# Altium PCB Top.PcbDoc
Units mm, origin at the board's own origin, x right, y up, seen from the top; angles counter-clockwise.
Board outline 79.88 x 59.94 mm, 2 copper layers (Top Layer, Bottom Layer), stack 1.569 mm thick; 82 components, 71 nets, 335 pads, 76 vias.
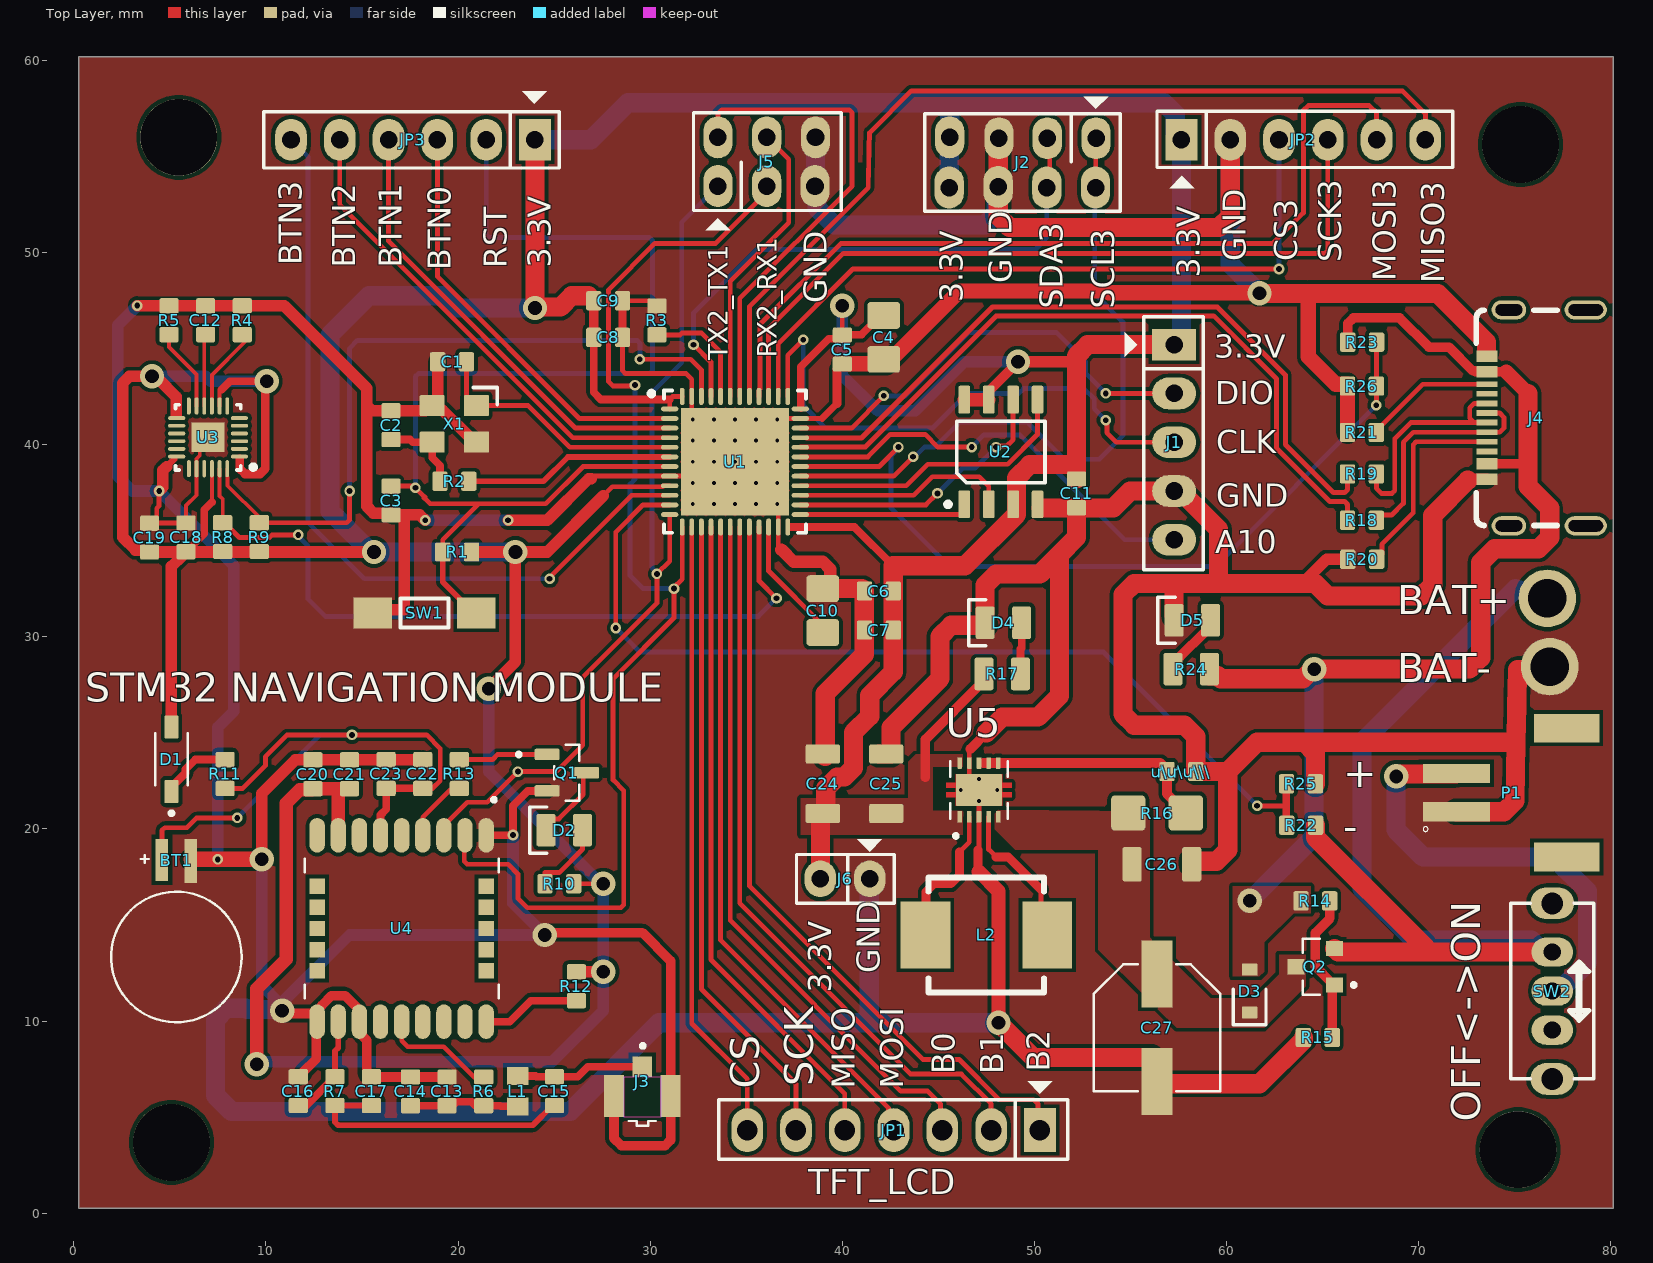
[diagram p0: Top Layer view]
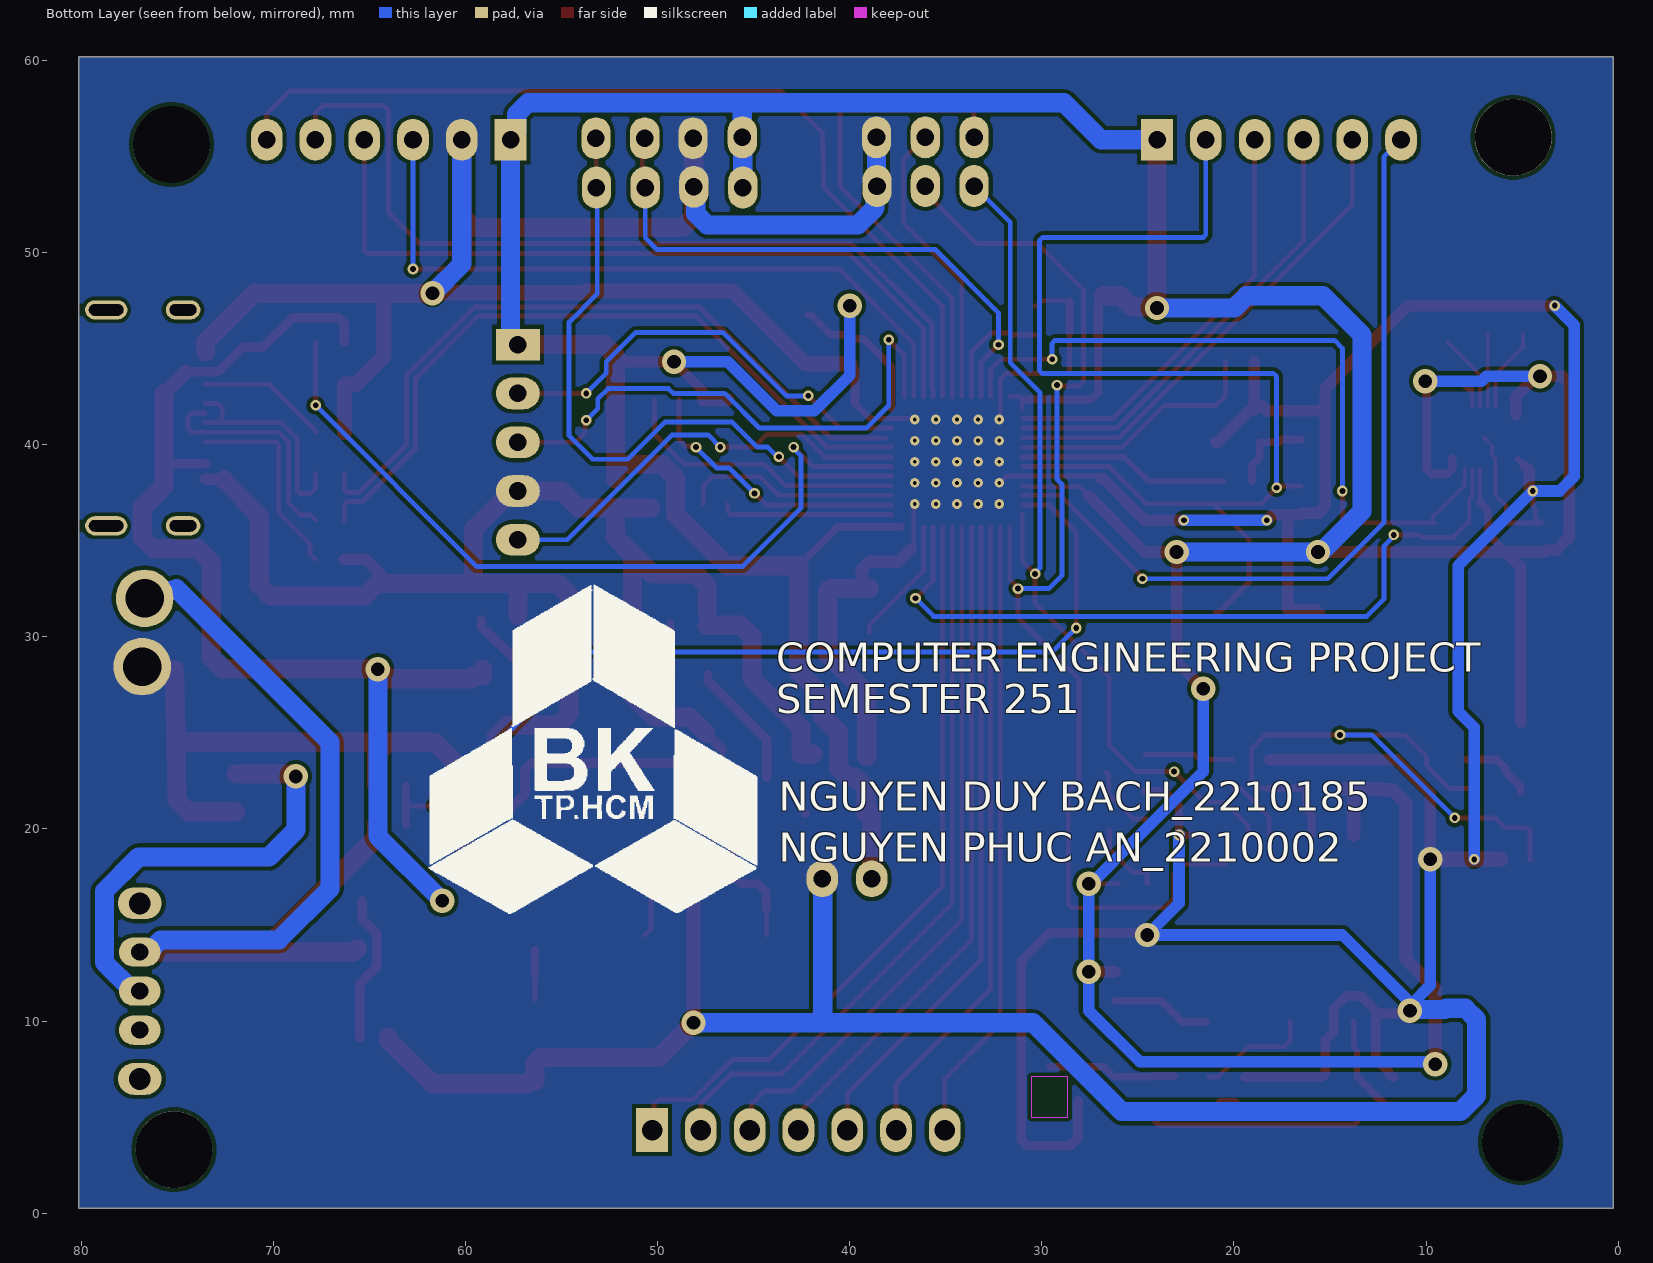
[diagram p1: Bottom Layer view, seen from below]
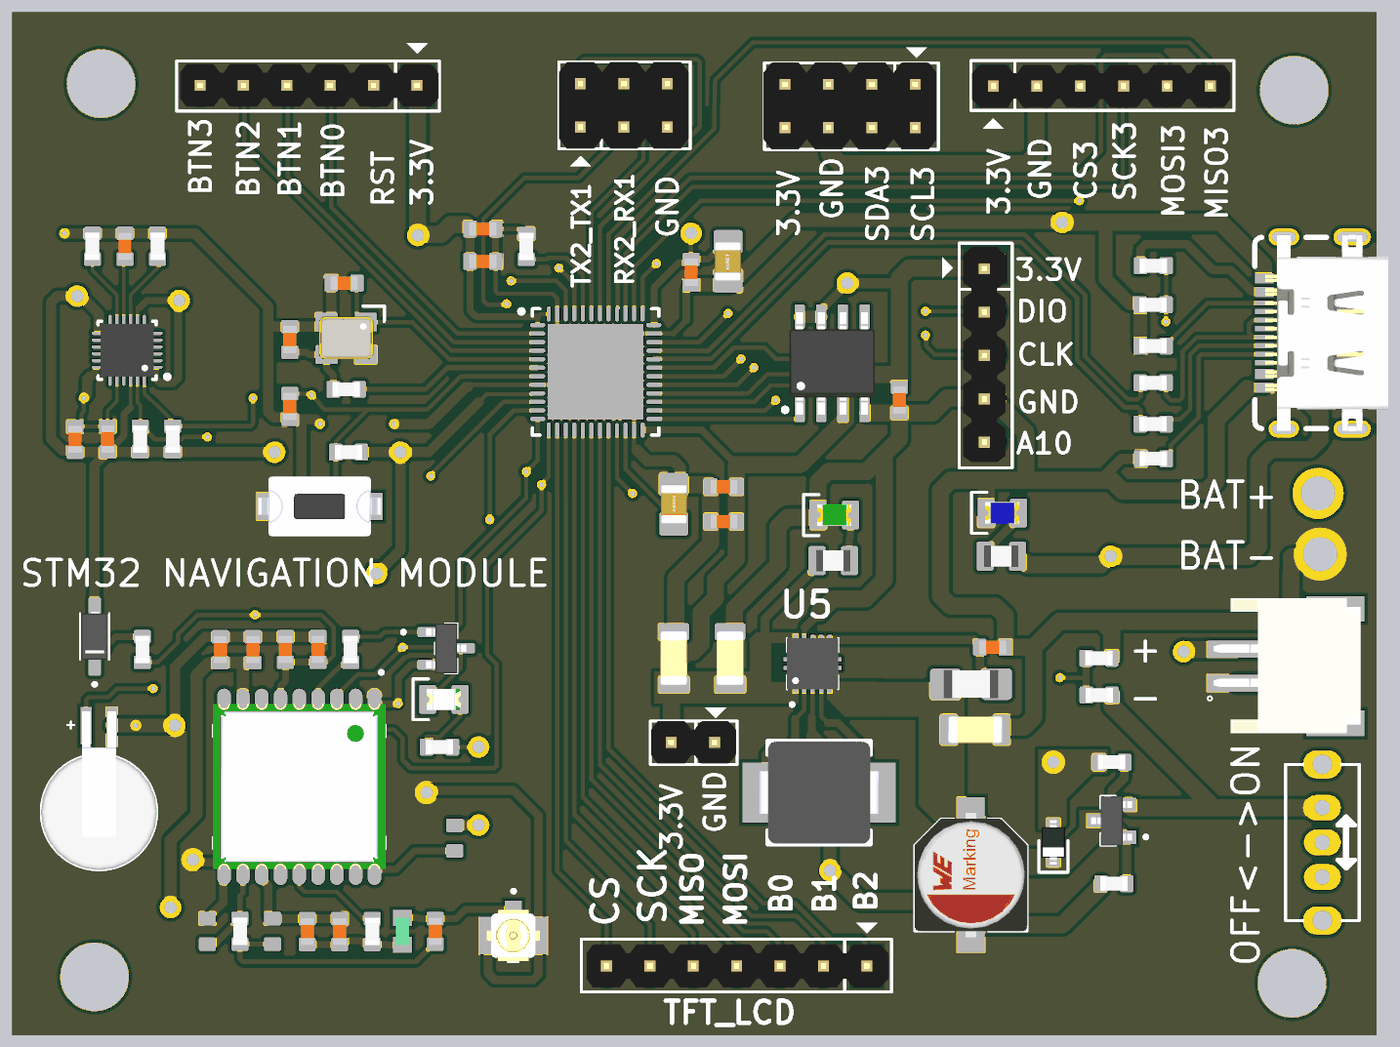
[diagram p2: 3D render of the assembled board from above, using the file's embedded part models]

## Layer stack, top to bottom
Top Solder: solder mask 0.0254, SM-001, Dk 4
Top Layer: signal copper 0.035
Dielectric 1: core 1.4986, Core-043, Dk 4.6
Bottom Layer: signal copper 0.035
Bottom Solder: solder mask 0.0254, SM-001, Dk 4

## Board outline
0.254,0.254 0.254,60.198 80.137,60.198 80.137,0.254

## Design rules (kind name [scope] priority, off if disabled: settings)
Clearance [All] p1: gap=0.2 ignorepadtopadclearanceinfootprint=TRUE
DiffPairsRouting [All] p1: maxlimit=0.203 minlimit=0.203 mostfreqgap=0.203 toplayer_minwidth=0.25 toplayer_maxwidth=0.27 toplayer_prefwidth=0.26 bottomlayer_minwidth=0.25 bottomlayer_maxwidth=0.27 bottomlayer_prefwidth=0.26 impedanceprofiledriven=TRUE maxuncoupledlength=12.7
HoleSize [All] p1: absolutevalues=TRUE maxlimit=4 minlimit=0.025 maxpercent=80.000 minpercent=20.000
MinimumSolderMaskSliver [All] p1: minsoldermaskwidth=0.01
NetAntennae [All] p1 off: netantennaetolerance=1
PolygonConnect [All] p1: connectstyle=Direct reliefconductorwidth=0.254 reliefentries=4 polygonreliefangle="90 Angle" airgapwidth=0.254
RoutingVias [All] p1: holewidth=0.3 width=0.55 viastyle="Through Hole" minholewidth=0.2 minwidth=0.3 maxholewidth=0.1 maxwidth=2
SilkToSolderMaskClearance [IsPad] p1: minsilkscreentomaskgap=0 clearancetoexposedcopper=TRUE
SolderMaskExpansion [All] p1: expansion=0.05 istentingtop=FALSE
SupplyNets "Schematic Supply Nets_6" [InNet('V_BUS')] p1: voltage=0.000
SupplyNets "Schematic Supply Nets_4" [InNet('IMU_VIN')] p2: voltage=0.000
SupplyNets "Schematic Supply Nets_3" [InNet('GND')] p3: voltage=0.000
SupplyNets "Schematic Supply Nets_1" [InNet('GPS_VBAT')] p4: voltage=0.000
SupplyNets "Schematic Supply Nets" [InNet('V_BAT')] p5: voltage=0.000
Width [All] p1: maxlimit=1 minlimit=0.2 preferedwidth=0.25 minimp=50.000000 maximp=50.000000 favimp=50.000000
25 further rules are at their usual default settings.

## Classes and differential pairs
component class Designator: BT1 C12 C13 C14 C15 C16 C17 C18 C19 C20 C21 C22 C23 D1 D2 J3 L1 Q1 R4 R5 R6 R7 R8 R9 R10 R11 R12 R13 U3 U4
differential pair USB_D: +USB_D_P -USB_D_N

## Components (designator, comment, footprint, x,y, rotation, side; value= is the part's Value field where it differs from the comment)
BT1 "MS621FE-FL11E" BAT_MS621FE-FL11E 5.334,13.335 r90 top
C1 "15pF" CAP_0603 19.685,44.323 r180 top
C2 "15pF" CAP_0603 16.51,41.021 r90 top
C3 "100nF" CAP_0603 16.51,37.096 r90 top
C4 "2.2uF" CAP_0805 42.164,45.593 r90 top
C5 "100nF" CAP_0603 40.005,44.958 r90 top
C6 "100nF" CAP_0603 41.91,32.385 r0 top
C7 "100nF" CAP_0603 41.91,30.353 r0 top
C8 "100nF" CAP_0603 27.813,45.593 r180 top
C9 "100nF" CAP_0603 27.813,47.498 r180 top
C10 "2.2uF" CAP_0805 38.989,31.369 r270 top
C11 "0603 100nF 16V 10%" CAP_0603 52.197,37.465 r90 top
C12 "100nF" CAP_0603 6.858,46.482 r270 top
C13 "SMD 0603 100pF" CAP_0603 19.431,6.338 r90 top
C14 "SMD 0603 100nF" CAP_0603 17.526,6.338 r90 top
C15 "SMD 0603 100pF" CAP_0603 25.019,6.35 r90 top
C16 "SMD 0603 NC" NC_0603 11.684,6.35 r90 top
C17 "SMD 0603 NC" NC_0603 15.494,6.35 r90 top
C18 "100nF" CAP_0603 5.842,35.179 r270 top
C19 "10nF" CAP_0603 3.937,35.167 r270 top
C20 "100nF" CAP_0603 12.446,22.848 r270 top
C21 "33nF" CAP_0603 14.351,22.848 r270 top
C22 "SMD 0603 100nF" CAP_0603 18.161,22.86 r270 top
C23 "SMD 0603 33nF" CAP_0603 16.256,22.86 r270 top
C24 "10uF" CAP_1206 38.989,22.352 r270 top
C25 "10uF" CAP_1206 42.291,22.352 r270 top
C26 "10uF" CAP_1206 56.642,18.161 r180 top
C27 "100uF" CAP-ALU-SMD-6.3x7.7x2.2 56.388,9.652 r270 top
D1 "1N4148W-7" SOD3715X135N 5.08,23.622 r90 top
D2 "BLUE" LED_0805 25.527,19.939 r0 top
D3 "D_SCHOTTKY_SOD_323" SOD-323 61.214,11.557 r270 top
D4 "GREEN" LED_0805_GREEN 48.387,30.734 r0 top
D5 "BLUE" LED_0805_BLUE 58.227,30.861 r0 top
J1 "JP5" JP5 57.277,45.212 r270 top
J2 "Connector 4x2" JP4x2 49.39,54.699 r180 top
J3 "IPEX" IPEX_20279-001E-03 29.591,6.095 r180 top
J4 "USB4510-03-1-A" USB4510-03-1-A 76.708,41.402 r90 top
J5 "Connector 3x2" JP3x2 36.068,54.737 r0 top
J6 "Jumper 2" JP2 41.427,17.399 r180 top value="JP 2"
JP1 "JP7 PIN" JP7 50.292,4.318 r180 top value=JP7
JP2 "JP6 PIN" JP6 57.658,55.88 r0 top value=JP7
JP3 "JP6 PIN" JP6 24.003,55.88 r180 top value=JP7
L1 "SMD 0603 68nH" "0603 INDUCTOR" 23.114,6.35 r90 top
L2 "2.2uH" INDC6060X300 47.498,14.478 r0 top
P1 "S2B-PH-SM4-TB" JST_S2B-PH-SM4-TB 71.974,21.892 r270 top locked
Q1 "SI2306BDS-T1-GE3" SOT95P237X112-3N 25.663,22.926 r0 top
Q2 "P_MOSFET" P_MOSFET_SOT23 64.627,12.827 r180 top
R1 "10k" RES_0603 19.951,34.417 r0 top
R2 "0R" RES_0603 19.812,38.1 r180 top
R3 "10k" RES_0603 30.353,46.47 r270 top
R4 "10k" RES_0603 8.763,46.482 r90 top
R5 "10k" RES_0603 4.953,46.482 r90 top
R6 "R0603 10R" RES_0603 21.336,6.338 r270 top
R7 "R0603 0R" RES_0603 13.589,6.35 r270 top
R8 "10k" RES_0603 7.747,35.191 r270 top
R9 "10k" RES_0603 9.652,35.191 r270 top
R10 "R0603 1K" RES_0603 25.273,17.145 r0 top
R11 "R0603 470R" RES_0603 7.874,22.86 r90 top
R12 "R0603 NC" NC_0603 26.162,11.811 r270 top
R13 "R0603 1K" RES_0603 20.066,22.86 r270 top
R14 "10R" RES_0603 64.631,16.256 r180 top
R15 "10K" RES_0603 64.758,9.144 r0 top
R16 "100R" RES_1206 56.388,20.828 r180 top
R17 "1K" RES_0805 48.326,28.067 r180 top
R18 "22R" RES_0603 67.056,36.068 r0 top
R19 "22R" RES_0603 67.056,38.481 r0 top
R20 "5.1K" RES_0603 67.068,34.036 r0 top
R21 "5.1K" RES_0603 67.056,40.64 r0 top
R22 "66K" RES_0603 63.893,20.193 r0 top
R23 "80K" RES_0603 67.068,45.339 r180 top
R24 "1.5K" RES_0805 58.166,28.321 r0 top
R25 "200K" RES_0603 63.881,22.352 r180 top
R26 "200K" RES_0603 67.056,43.053 r0 top
SW1 "DTSM-3" DTSM-3 18.255,31.242 r180 top
SW2 "SW102A" SW102 76.962,9.525 r90 top locked value="Switch 102 On Board"
U1 "STM32F411CEU6" STM-UFQFPN48_L 34.417,39.116 r0 top
U2 "W25Q128JVSIM" SOIC-8 48.26,39.624 r90 top
U3 "MPU-9250" INSE-QFN-24-1700X1540TP_M 6.985,40.386 r180 top
U4 "LC76G" XCVR_LC76G 17.063,14.818 r270 top
U5 "TPS63001DRCR" VREG_V62/16624-01YE 47.117,22.031 r90 top
X1 "3225 25MHZ" XTAL_3225 19.805,41.087 r180 top
ư\ư\ư\\\ "100nF" CAP_0603 57.658,22.987 r180 top (schematic designator C28)

## Footprints (in the part's own frame and the unit in brackets; to place one, negate y for a bottom-side part, rotate by r counter-clockwise, add the part's x,y. Pads: shape width x height; smd on the part's side, far side on the other; paste and mask are expansions set on the pad)
"0603 INDUCTOR" [mm]
  rect 0.94x1.11 smd: 1(-0.789,0) 2(0.789,0)
  body extent -0.8,-0.4 0.8,0.4, height 1
BAT_MS621FE-FL11E [mm]
  rect 2.3x0.65 smd: NEG(5,-0.75)
  rect 2.2x0.65 smd: POS(5.05,0.75)
  silkscreen extent -3.4,-3.4 5.3,3.4, body extent -3.4,-3.4 5.9,3.4, height 2.8
CAP-ALU-SMD-6.3x7.7x2.2 [mm]
  rect 3.5x1.6 smd: 1(-2.8,0) 2(2.8,0)
  silkscreen extent -3.3,-3.3 3.3,3.3, body extent -3.65,-3.3 3.65,3.3, height 7.65
CAP_0603 [mm]
  rrect25% 0.8x1 smd: 1(-0.75,0) 2(0.75,0)
  body extent -0.8,-0.4 0.8,0.4, height 0.51
CAP_0805 [mm]
  rrect25% 1.4x1.7 smd: 1(-1.143,0) 2(1.143,0)
  body extent -1.15,-0.76 1.15,0.79, height 1.01
CAP_1206 [mm]
  rrect25% 1x1.8 smd: 1(-1.55,0) 2(1.55,0)
  body extent -1.6,-0.8 1.6,0.8, height 0.94
DTSM-3 [mm]
  rect 2x1.6 smd: 1(-2.7,0) 2(2.7,0)
  silkscreen extent -1.25,-0.75 1.25,0.75, body extent -3.6,-1.75 3.6,1.75, height 4.96
INDC6060X300 [mm]
  rect 2.6x3.5 smd: 1(-3.175,0) 2(3.175,0)
  silkscreen extent -3,-3 3,3, body extent -3.55,-3 3.55,3, height 3
INSE-QFN-24-1700X1540TP_M [mm] "QFN, 24-Leads, Body 3.1x3.1mm, Pitch 0.40mm, Thermal Pad 1.54x1.70mm, IPC Low Density"
  oval 0.89x0.2 smd: 1(-1.632,1) 13(1.632,-1)
  oval 0.9x0.2 smd: 2(-1.632,0.6) 3(-1.632,0.2) 4(-1.632,-0.2) 5(-1.632,-0.6) 6(-1.632,-1) 14(1.632,-0.6) 15(1.632,-0.2) 16(1.632,0.2) 17(1.632,0.6) 18(1.632,1)
  oval 0.2x0.9 smd: 7(-1,-1.632) 8(-0.6,-1.632) 9(-0.2,-1.632) 10(0.2,-1.632) 11(0.6,-1.632) 12(1,-1.632) 20(0.6,1.632) 21(0.2,1.632) 22(-0.2,1.632) 23(-0.6,1.632)
  oval 0.2x0.89 smd: 19(1,1.632)
  oval 0.2x0.89 smd mask+0.102: 24(-1,1.632)
  rect 1.7x1.54 smd: 25(0,0)
  silkscreen extent -2.48,-1.7 1.7,1.7, body extent -1.55,-1.55 1.55,1.55, height 1.05
IPEX_20279-001E-03 [mm]
  rect 1x1.05 smd: 1(0,-1.525)
  rect 1.05x2.2 smd: 2(1.475,0) 3(-1.475,0)
  Keep-Out Layer region: 0.95,-1 -0.95,-1 -0.95,1.1 0.95,1.1
  silkscreen extent -0.7,-2.71 0.7,1.55, body extent -1.5,-1.55 1.5,1.55, height 1.25
JP2 [mil]
  oval 65x75 hole 36: 1(0,0) 2(101,0)
  silkscreen extent -50,-81 150,50, body extent -48,-50 148,48, height 323
JP3x2 [mil] "Connector 3x2"
  oval 60x86 hole 36: 1(-100,-50) 2(0,-50) 3(99,-50) 4(-100,50) 5(0,50) 6(100,50)
  silkscreen extent -150,-141 153,100, body extent -150,-100 150,100, height 335
JP4x2 [mil] "Connector 4x2"
  oval 60x86 hole 36: 1(-150.5,-49.5) 2(-50.5,-49.5) 3(48.5,-49.5) 4(149.5,-51.5) 5(-149.5,51.5) 6(-49.5,51.5) 7(50,50) 8(150.5,51.5)
  silkscreen extent -200,-135 200,101, body extent -197,-100 203,100, height 335
JP5 [mil] "JP5"
  rect 65x90 hole 36: 1(0,0)
  oval 65x90 hole 36: 2(100,0) 3(200,0) 4(300,0) 5(400,0)
  silkscreen extent -57,-101 461,60, body extent -48,-53 448,45, height 323
JP6 [mil] "JP6"
  rect 65x85 hole 36: 1(0,0)
  oval 65x85 hole 36: 2(100,0) 3(200,0) 4(300,0) 5(400,0) 6(500,0)
  silkscreen extent -50,-99 556,58, body extent -48,-50 548,48, height 323
JP7 [mil] "JP7"
  rect 65x90 hole 42: 1(0,0)
  oval 65x90 hole 42: 2(100,0) 3(200,0) 4(300,0) 5(400,0) 6(500,0) 7(600,0)
  silkscreen extent -57,-100 658,60, body extent -50,-49 646,49, height 323
JST_S2B-PH-SM4-TB [mm]
  rect 1x3.5 smd: 1(1,0) 2(-1,0)
  rect 1.5x3.4 smd: P1(3.35,5.75) P2(-3.35,5.75)
  silkscreen extent 1.77,-1.73 2.03,-1.47, body extent -3.96,-1.38 3.94,7.22, height 5.5
LED_0805 [mm]
  rrect25% 1x1.7 smd: A(0.95,0) K(-0.95,0)
  silkscreen extent -1.8,-1.2 -0.9,1.2, body extent -1,-0.63 1,0.63, height 0.8
LED_0805_BLUE [mm]
  rrect25% 1x1.7 smd: A(0.95,0) K(-0.95,0)
  silkscreen extent -1.8,-1.2 -0.9,1.2, body extent -1,-0.63 1,0.63, height 1.12
LED_0805_GREEN [mm]
  rrect25% 1x1.7 smd: A(0.95,0) K(-0.95,0)
  silkscreen extent -1.8,-1.2 -0.9,1.2, body extent -1,-0.63 1,0.63, height 1.12
NC_0603 [mm]
  rrect25% 0.8x1 smd: 1(-0.75,0) 2(0.75,0)
P_MOSFET_SOT23 [mm]
  rect 0.9x0.8 smd: 1(-1,0.95) 2(-1,-0.95) 3(1,0)
  silkscreen extent -2.1,-1.45 0.65,1.45, body extent -1.2,-1.45 1.2,1.45, height 1.2
RES_0603 [mm]
  rrect25% 0.8x1 smd: 1(-0.75,0) 2(0.75,0)
  body extent -0.8,-0.43 0.8,0.43, height 0.52
RES_0805 [mm]
  rrect25% 1x1.7 smd: 1(-0.95,0) 2(0.95,0)
  body extent -1,-0.63 1,0.63, height 0.47
RES_1206 [mm]
  rrect25% 1.8x1.84 smd: 1(-1.5,0) 2(1.5,0)
  body extent -1.6,-0.83 1.6,0.83, height 0.57
SOD3715X135N [mm]
  rrect18% 1.21x0.73 smd: A(1.68,0) C(-1.68,0)
  silkscreen extent -2.9,-0.85 1.35,0.85, body extent -1.83,-0.77 1.83,0.77, height 0.74
SOD-323 [mm]
  rrect25% 0.63x0.83 smd: A(-1.115,0) K(1.115,0)
  silkscreen extent -0.1,-0.85 1.75,0.85, body extent -1.3,-0.68 1.3,0.68, height 1.1
SOIC-8 [mm] "SOIC, 8-Leads, Body 4.91x3.90mm, Pitch 1.27mm, IPC Medium Density"
  rrect25% 1.45x0.6 smd: 1(-2.725,1.905) 2(-2.725,0.635) 3(-2.725,-0.635) 4(-2.725,-1.905) 5(2.725,-1.905) 6(2.725,-0.635) 7(2.725,0.635) 8(2.725,1.905)
  silkscreen extent -2.85,-2.3 1.6,2.88, body extent -3,-2.5 3,2.5, height 1.75
SOT95P237X112-3N [mm]
  rrect25% 1.3x0.6 smd: 1(-1.025,0.95) 2(-1.025,-0.95) 3(1.025,0)
  silkscreen extent -2.6,-1.46 0.65,1.46, body extent -1.18,-1.46 1.18,1.46, height 1.12
STM-UFQFPN48_L [mm] "QFN, 48-Leads, Body 7.1x7.1mm, Pitch 0.5mm, Thermal Pad 5.6x5.6mm, IPC High Density"
  oval 0.9x0.25 smd: 1(-3.4,2.75) 2(-3.4,2.25) 3(-3.4,1.75) 4(-3.4,1.25) 5(-3.4,0.75) 6(-3.4,0.25) 7(-3.4,-0.25) 8(-3.4,-0.75) 9(-3.4,-1.25) 10(-3.4,-1.75) 11(-3.4,-2.25) 12(-3.4,-2.75) 25(3.4,-2.75) 26(3.4,-2.25) 27(3.4,-1.75) 28(3.4,-1.25) 29(3.4,-0.75) 30(3.4,-0.25) 31(3.4,0.25) 32(3.4,0.75) 33(3.4,1.25) 34(3.4,1.75) 35(3.4,2.25) 36(3.4,2.75)
  oval 0.25x0.9 smd: 13(-2.75,-3.4) 14(-2.25,-3.4) 15(-1.75,-3.4) 16(-1.25,-3.4) 17(-0.75,-3.4) 18(-0.25,-3.4) 19(0.25,-3.4) 20(0.75,-3.4) 22(1.75,-3.4) 23(2.25,-3.4) 24(2.75,-3.4) 37(2.75,3.4) 38(2.25,3.4) 39(1.75,3.4) 40(1.25,3.4) 41(0.75,3.4) 42(0.25,3.4) 43(-0.25,3.4) 44(-0.75,3.4) 45(-1.25,3.4) 46(-1.75,3.4) 47(-2.25,3.4) 48(-2.75,3.4)
  oval 0.25x0.8 smd: 21(1.25,-3.4)
  rect 5.6x5.6 smd: 49(0,0)
  silkscreen extent -4.47,-3.7 3.7,3.7, body extent -3.55,-3.55 3.55,3.55, height 0.6
SW102 [mil] "Switch 102 On Board nho"
  oval 60x85 hole 35: 1(0,0) 2(80,0) 3(160,0)
  oval 65x90 hole 45: 4(260,0) 5(-100,0)
  silkscreen extent -100,-85 260,85
USB4510-03-1-A [mm]
  rect 0.6x1.1 smd: A1B12(-3.2,3.15) A4B9(-2.4,3.15) B1A12(3.2,3.15) B4A9(2.4,3.15)
  rect 0.3x1.1 smd: A5(-1.25,3.15) A6(-0.25,3.15) A7(0.25,3.15) A8(1.25,3.15) B5(1.75,3.15) B6(0.75,3.15) B7(-0.75,3.15) B8(-1.75,3.15)
  oval 1x2.2 hole 0.6 slot 1.8 at 90 deg: SH(-5.62,-2) SH(5.62,-2)
  oval 1x1.8 hole 0.6 slot 1.4 at 90 deg: SH(-5.62,2) SH(5.62,2)
  silkscreen extent -5.6,-0.5 5.6,3.7, body extent -5.77,-4.1 5.77,3.1, height 1.57
VREG_V62/16624-01YE [mm]
  rrect25% 0.6x0.24 smd mask+0: 1(-1.4,1) 2(-1.4,0.5) 3(-1.4,0) 4(-1.4,-0.5) 5(-1.4,-1) 6(1.4,-1) 7(1.4,-0.5) 8(1.4,0) 9(1.4,0.5) 10(1.4,1)
  rrect5% 1.65x2.4 smd paste-2 mask+0: 11(0,0)
  round 0.3 hole 0.2 mask+0: 12(0,-0.95) 13(-0.575,0) 14(0.575,0) 15(0,0.95)
  Top Layer region: 0.375,1.2 0.825,1.2 0.825,-1.2 0.375,-1.2 0.375,-1.7 0.125,-1.7 0.125,-1.2 -0.125,-1.2 -0.125,-1.7 -0.375,-1.7 -0.375,-1.2 -0.825,-1.2 -0.825,1.2 -0.375,1.2 -0.375,1.7 -0.125,1.7 -0.125,1.2 0.125,1.2 0.125,1.7 0.375,1.7
  silkscreen extent -2.49,-1.5 1.5,1.5, body extent -1.5,-1.5 1.5,1.5, height 1
XCVR_LC76G [mm]
  oval 1.8x0.8 smd: 1(-4.85,4.4) 2(-4.85,3.3) 3(-4.85,2.2) 4(-4.85,1.1) 5(-4.85,0) 6(-4.85,-1.1) 7(-4.85,-2.2) 8(-4.85,-3.3) 9(-4.85,-4.4) 10(4.85,-4.4) 11(4.85,-3.3) 12(4.85,-2.2) 13(4.85,-1.1) 14(4.85,0) 15(4.85,1.1) 16(4.85,2.2) 17(4.85,3.3) 18(4.85,4.4)
  rect 0.8x0.8 smd: 19(2.2,4.4) 20(1.1,4.4) 21(0,4.4) 22(-1.1,4.4) 23(-2.2,4.4) 24(-2.2,-4.4) 25(-1.1,-4.4) 26(0,-4.4) 27(1.1,-4.4) 28(2.2,-4.4)
  silkscreen extent -6.8,-5.05 3.63,5.05, body extent -4.85,-5.05 4.85,5.05, height 2.65
XTAL_3225 [mm]
  rrect10% 1.3x1.1 smd: 1(-1.15,-0.95) 2(1.15,-0.95) 3(1.15,0.95) 4(-1.15,0.95)
  silkscreen extent -2.23,-1.89 -1,-1, body extent -1.6,-1.28 1.6,1.22, height 0.61

## Part data
BT1: "Coin, 6.8mm 3 V Lithium Battery Rechargeable (Secondary) 5.5mAh", Package="QFP-128 Seiko", Availability="In Stock", Check_prices=https://www.snapeda.com/parts/MS621FE-FL11E/Seiko+Instruments/view-part/?ref=eda, MF="Seiko Instruments", MP=MS621FE-FL11E, Price=None, Purchase-URL=https://pricing.snapeda.com/search/part/MS621FE-FL11E/?ref=eda, SnapEDA_Link=https://www.snapeda.com/parts/MS621FE-FL11E/Seiko+Instruments/view-part/?ref=snap
C1 C2 C3 C5 C6 C7 C8 C9 C11 C12 C13 C14 C15 C16 C17 C18 C19 C20 C21 C22 C23 ư\ư\ư\\\: library part CAP_0603, "Capacitor SMD 0603"
C4 C10: library part CAP_0805, "Capacitor SMD 0805"
C24 C25 C26: library part CAP_1206, "Capacitor SMD 1206"
C27: library part CN-ALU-SMD, "Polarized Capacitor (Axial)", LatestRevisionDate=17-Jul-2002, LatestRevisionNote="Re-released for DXP Platform.", PackageReference=POLAR0.8, Published=8-Jun-2000, Publisher="Altium Limited"
D1: "Diode Standard 100 V 300mA (DC) Surface Mount SOD-123", Package="SOD-123 Fairchild Semiconductor", Availability="In Stock", Check_prices=https://www.snapeda.com/parts/1N4148W-7/Diodes+Inc./view-part/?ref=eda, MF="Diodes Inc.", MP=1N4148W-7, Price=None, Purchase-URL=https://pricing.snapeda.com/search/part/1N4148W-7/?ref=eda, SnapEDA_Link=https://www.snapeda.com/parts/1N4148W-7/Diodes+Inc./view-part/?ref=snap
D2: library part LED_0805, "LED 0805 BLUE SMD"
D3: "Diode Schottky SMD SOD-323"
D4: library part LED_0805_GREEN, "LED 0805 GREEN SMD"
D5: library part LED_0805_BLUE, "LED 0805 BLUE SMD"
J2: library part JP4x2
J3: "1 POS Vertical SMD Small form factor with big performance through 6 GHz connector,MHF, RF, micro-coaxial MHF I Receptacle", Package=None, Check_prices=https://www.snapeda.com/parts/20279-001E-03/I-PEX/view-part/?ref=eda, MF=I-PEX, MP=20279-001E-03, SnapEDA_Link=https://www.snapeda.com/parts/20279-001E-03/I-PEX/view-part/?ref=snap
J4: "USB Connector Type C SMT Mid-Mount 16 Pin", Manufacturer=GCT, Manufacturer Part Number=USB4510-03-1-A
J5: library part JP3x2
J6: library part "JP 2"
JP1: library part JP7
JP2 JP3: library part JP6
L1: library part INDUCTOR_0603, "Inductor with 0603 (1608)", Package="1608 Murata", Availability=Warning, Check_prices=https://www.snapeda.com/parts/LQW18AS22NG0CD/Murata/view-part/4476690/?ref=eda, MF=Murata, MP=LQW18AS22NG0CD, Price=None, Purchase-URL=https://pricing.snapeda.com/search/part/LQW18AS22NG0CD/?ref=eda, SnapEDA_Link=https://www.snapeda.com/parts/LQW18AS22NG0CD/Murata/view-part/4476690/?ref=snap
L2: library part CSAB0630-100M, "SMD Inductor 10uH-20%-5A", Package=None, Check_prices=https://www.snapeda.com/parts/CSAB0630-100M/Codaca/view-part/?ref=eda, MF=Codaca, MP=CSAB0630-100M, SnapEDA_Link=https://www.snapeda.com/parts/CSAB0630-100M/Codaca/view-part/?ref=snap
P1: "Connector Header Surface Mount, Right Angle 2 position 0.079 (2.00mm)", Package=None, Check_prices=https://www.snapeda.com/parts/S2B-PH-SM4-TB/JST/view-part/?ref=eda, MF="JST Sales", MP=S2B-PH-SM4-TB, SnapEDA_Link=https://www.snapeda.com/parts/S2B-PH-SM4-TB/JST/view-part/?ref=snap
Q1: "N-Channel 30 V 3.16A (Ta) 750mW (Ta) Surface Mount SOT-23-3 (TO-236)", Package="SOT-23-3 Vishay Siliconix", Check_prices=https://www.snapeda.com/parts/SI2306BDS-T1-GE3/Vishay/view-part/?ref=eda, MF="Vishay Siliconix", MP=SI2306BDS-T1-GE3, SnapEDA_Link=https://www.snapeda.com/parts/SI2306BDS-T1-GE3/Vishay/view-part/?ref=snap
Q2: "MOSFET, SOT-23, P, -30V, -4A, 0.065â„", Package="SOT-23 Diotec", Check_prices=https://www.snapeda.com/parts/MMFTP3401/Diotec/view-part/?ref=eda, MF="Diotec Semiconductor", MP=MMFTP3401, SnapEDA_Link=https://www.snapeda.com/parts/MMFTP3401/Diotec/view-part/?ref=snap
R1 R2 R3 R4 R5 R6 R7 R8 R9 R10 R11 R12 R13 R14 R15 R18 R19 R20 R21 R22 R23 R25 R26: library part RES_0603, "Resistor SMD 0603"
R16: library part RES_1206, "Resistor SMD 1206"
R17 R24: library part RES_0805, "Resistor SMD 0805"
SW1: "Tactile Switch SMD SPST", Manufacturer=Diptronics, Manufacturer Part Number=DTSM-3
SW2: "Switch 102 on Broad"
U1: library part CMP-0243-00165-1, "ARM Cortex-M4 32-bit MCU+FPU, 512 KB Flash, 128 KB RAM, 36 I/Os, 48-Pin UFQFPN, -40 to 85 degC, Tray", I/Os (High Current)=36, Operating Frequency(F) (Processor speed) (MHz)=100, Package Description=UFQFPN48, Package Reference="48-Pin Ultra Thin Fine Pitch Quad Flat No-Lead, 7 x 7 x 0.6 mm Body, 0.5 mm Pitch, Exposed Pad", Supply Voltage(Vcc) min (V)=1.7, ComponentLink1Description="Manufacturer URL", ComponentLink1URL=http://www.st.com/, ComponentLink2Description=Datasheet, ComponentLink2URL=http://www.st.com/st-web-ui/static/active/en/resource/technical/document/datasheet/DM00115249.pdf, Core="ARM Cortex-M4", DatasheetVersion="Rev. 6", FLASH Size (Prog) (kB)=512, Internal RAM Size (kB)=128, Mounting Technology="Surface Mount", Packing=Tray
U2: "128M-BIT / SERIAL FLASH MEMORY WITH / DUAL/QUAD SPI & QPI & DTR SOIC-8", Manufacturer=Winbond, Manufacturer Part Number=W25Q128JVSIM
U3: library part CMP-2100-03657-1, "9-axis MotionTracking device, 2.4 to 3,6 V, -40 to 85 degC, 24-Pin QFN, RoHS, Tape and Reel", Case/Package=QFN, Manufacturer=InvenSense, Max Operating Temperature=85degC, Max Supply Voltage=3.6V, Min Operating Temperature=-40degC, Min Supply Voltage=2.4V, Package Description="24-Pin Quad Flat No-lead Package, Body 3 x 3 mm, Pitch 0.4 mm", Package Quantity=1, Package Reference=QFN-24, Datasheet URL=http://datasheet.octopart.com/MPU-9250-InvenSense-datasheet-21859386.pdf, Datasheet Version="Rev. 1.0, 01/2014", Height=1mm, Length=3.1mm, Manufacturer URL=http://www.invensense.com/, Mount=SurfaceMount, RoHSCompliant=true, Width=3.1mm
U4: Package=None, Availability=Unavailable, MF=Quectel, MP=LC76G, Price=None
U5: "96% Buck-Boost Converter with 1.7A Current Switches, 3.3V fixed Output voltage in 3x3 QFN", Package="VSON-10 Texas Instruments", Check_prices=https://www.snapeda.com/parts/TPS63001DRCR/Texas+Instruments/view-part/?ref=eda, MF="Texas Instruments", MP=TPS63001DRCR, SnapEDA_Link=https://www.snapeda.com/parts/TPS63001DRCR/Texas+Instruments/view-part/?ref=snap
X1: library part "XTAL 4 Pin", "Crystal Oscillator"

## Free pads (board coordinates)
  round 4 hole 4: 2(5.08,3.683) 2(5.461,56.007) 2(75.184,3.302) 2(75.311,55.626)
  round 3 hole 2: ""(76.708,32.004) ""(76.835,28.448)

## Via types
v1: diameter 0.55, hole 0.3, Top Layer to Bottom Layer, 32 vias
v2: diameter 0.5, hole 0.2, Top Layer to Bottom Layer, 25 vias
v3: diameter 1.27, hole 0.711, Top Layer to Bottom Layer, 19 vias

## Nets (pads, with @x,y where several pads share a name; then routed paths per layer and width w, separated by ;. In a path a pad name is that pad's centre, name@x,y a point inside that pad or via, vN(x,y) a via of type N, cw(c..) or ccw(c..) an arc to the next point about the centre after c; other vN are vias at no path point)
1PPS: R13.2 U4.4 | length 3.5
  Top Layer w0.25: U4.4 18.163,20.597 19.676,22.11 R13.2
BTN0: JP3.3 U1.2 | length 22.3
  Top Layer w0.25: JP3.3 18.923,48.761 26.318,41.366 U1.2
BTN1: JP3.4 U1.3 | length 23.9
  Top Layer w0.25: JP3.4 16.383,50.597 26.114,40.866 U1.3
BTN2: JP3.5 U1.4 | length 25.6
  Top Layer w0.25: JP3.5 13.843,52.5 25.977,40.366 U1.4
BTN3: JP3.6 U1.10 | length 42.2
  Top Layer w0.25: v1(24.765,33.02) 24.765,33.101 25.035,33.371 29.03,37.366 U1.10
  Bottom Layer w0.25: JP3.6 12.192,54.991 12.192,35.941 15.113,33.02 v1(24.765,33.02)
FLASH_CS: U1.25 U2.1 | length 9
  Top Layer w0.25: U1.25 46.18,36.366 46.355,36.541 U2.1
FLASH_MISO: U1.27 U2.2 | length 11.3
  Top Layer w0.25: U1.27 43.716,37.366 44.681,38.331 47.13,38.331 47.625,37.836 U2.2
FLASH_MOSI: U1.28 U2.5 | length 15.3
  Top Layer w0.25: U1.28 43.327,37.866 44.45,38.989 48.617,38.989 50.165,40.537 U2.5
FLASH_SCK: U1.26 U2.6 | length 14.6
  Top Layer w0.25: U1.26 44.359,36.866 v1(44.958,37.465) ; v1(48.006,39.878) 48.063,39.935 48.571,39.935 48.895,40.259 U2.6
  Bottom Layer w0.25: v1(44.958,37.465) 46.282,38.789 46.917,38.789 v1(48.006,39.878)
GND: BT1.NEG C1.2 C2.2 C3.1 C4.1 C5.1 C6.1 C7.1 C8.1 C9.1 C10.1 C11.1 C12.1 C13.2 C14.2 C16.2 C17.2 C18.1 C19.1 C20.1 C21.1 C22.1 C23.1 C24.1 C25.1 C26.1 C27.2 D4.K D5.K J1.4 J2.3 J2.7 J3.2 J3.3 J4.A1B12 J4.B1A12 J5.3 J5.6 J6.1 JP2.2 P1.1 pad.@76.835,28.448 Q1.2 R3.1 R4.2 R5.2 R15.1 R20.1 R21.1 R25.1 R26.1 SW1.2 U1.8 U1.23 U1.35 U1.47 U1.49 U2.4 U3.18 U3.20 U3.25 U4.1 U4.10 U4.12 U5.3 U5.9 U5.11 U5.12 U5.13 U5.14 U5.15 X1.2 X1.4 ư\ư\ư\\\.1 | length 526.7
  Top Layer w0.2: C18.1 5.842,36.83 6.385,37.373 U3.20 6.385,39.27 6.548,39.433 6.548,39.949 U3.25
  Top Layer w0.25: C19.1 4.037,35.917 C19.1@4.049,35.929 ; v1(4.445,37.592) 4.437,37.584 4.437,36.817 4.312,36.692 4.312,36.192 C19.1@4.049,35.929 ; C18.1 C19.1@4.049,35.929 ; 26.936,38.366 U1.8 31.867,38.366 v2(32.217,38.016) ; C8.1 28.563,43.851 28.709,43.704 31.877,43.704 32.167,43.415 U1.47 32.167,41.366 v2(32.217,41.316) ; C9.1 29.975,47.498 30.253,47.22 R3.1 ; v2(36.617,36.916) 36.667,36.866 U1.23 36.667,34.707 ; v2(36.617,41.316) 36.667,41.366 U1.35 38.953,41.366 ; C5.1@39.73,43.933 C5.1 ; 46.667,24.162 46.617,24.112 U5.9 46.617,22.531 U5.11 ; 47.067,18.923 47.117,18.923 U5.3 U5.13 ; JP2.2@60.198,55.626 JP2.2 ; J4.B1A12 J4.B1A12@73.57,44.589
  Top Layer w0.35: 4.826,38.862 5.207,39.243 ; 38.953,41.366 39.73,42.143
  Top Layer w0.4: U4.1 22.843,19.668 v1(22.86,19.685) 22.86,21.209 23.627,21.976 Q1.2 ; C8.1@28.563,45.835 C9.1
  Top Layer w0.45: 39.73,42.143 C5.1@39.73,43.933 ; 47.067,18.923 47.067,17.83 47.117,17.78
  Top Layer w0.5: v3(10.837,10.541) 10.984,10.394 12.589,10.394 U4.10@12.62,10.425 ; C16.2 11.784,7.1 11.934,7.25 11.934,7.35 12.62,8.036 U4.10@12.62,10.425 ; C13.2 C14.2 15.506,7.088 C17.2 15.394,7.1 15.244,7.25 15.244,9.006 14.806,9.444 14.806,10.627 14.115,11.318 13.411,11.318 12.913,10.82 12.913,10.799 12.62,10.506 U4.10@12.62,10.425 ; v3(24.511,14.478) 24.638,14.605 29.591,14.605 31.066,13.13 J3.3 31.066,3.8 30.773,3.507 28.497,3.507 28.116,3.888 J3.2@28.116,5.842 ; 46.667,24.162 47.496,24.991 ; D4.K@47.437,30.384 47.437,30.607 D4.K
  Top Layer w0.6: v1(3.302,47.244) 3.314,47.232 R5.2 C12.1 R4.2 10.949,47.232 15.24,42.941 15.24,42.037 ; v1(4.445,37.592) 4.636,37.783 4.636,38.672 4.826,38.862 ; BT1.NEG 6.084,18.39 BT1.NEG@6.109,18.415 ; v3(9.779,18.415) 9.779,21.844 11.532,23.597 12.445,23.597 C21.1 18.149,23.598 C22.1 ; SW1.2 15.723,31.41 17.201,31.41 17.201,36.346 ; v1(18.288,36.068) 18.01,36.346 17.201,36.346 ; X1.2@18.935,42.057 C1.2 ; X1.4 20.855,40.137 20.605,40.387 19.205,41.787 18.905,41.787 X1.2 18.555,42.037 18.289,41.771 C2.2 15.506,41.771 15.24,42.037 ; v1(22.606,36.068) 24.638,36.068 26.811,38.241 26.936,38.241 ; 64.135,32.782 64.135,32.958 65.213,34.036 R20.1 ; 72.569,38.152 72.619,38.202 J4.A1B12 ; 15.24,42.037 15.24,36.797 15.591,36.446 16.51,36.446 16.61,36.346 17.201,36.346
  Top Layer w0.65: 36.83,34.544 37.465,33.909 38.989,33.909 39.37,33.528 39.37,32.893 C10.1
  Top Layer w0.75: 47.117,17.78 48.133,16.764 v3(48.133,9.906)
  Top Layer w0.8: BT1.NEG@6.109,18.415 v1(7.493,18.415) v3(9.779,18.415) ; C5.1 42.303,44.208 46.101,48.006 53.784,48.006 53.884,47.906 61.695,47.906 v3(61.722,47.879) ; 64.262,47.879 64.262,47.752 64.262,44.577 65.686,43.153 66.306,43.153 R26.1 R21.1
  Top Layer w1: C10.1 41.033,32.512 C6.1 41.148,32.373 41.148,29.083 39.116,27.051 C24.1@39.116,23.775 ; C25.1@41.91,23.902 C25.1 42.545,23.902 42.545,25.285 45.085,27.825 45.085,30.021 45.671,30.607 D4.K@47.437,30.607 ; D4.K@47.437,31.27 47.437,32.688 48.023,33.274 50.292,33.274 51.308,34.29 ; 47.496,24.991 48.326,25.821 50.195,25.821 51.308,26.934 51.308,34.29 ; v3(48.133,9.906) 49.937,8.102 56.088,8.102 56.388,7.802 C27.2 56.617,6.852 56.769,6.731 61.722,6.731 64.008,9.017 R15.1 ; J2.3 48.12,55.918 J2.7 48.12,51.894 48.706,51.308 59.612,51.308 60.198,51.894 JP2.2@60.198,55.626 ; U2.4@50.34,36.712 C11.1@52.197,36.712 ; C11.1 C11.1@52.197,36.712 ; D5.K@57.277,31.115 57.277,32.619 57.439,32.782 ; C26.1 58.192,18.316 59.485,18.316 60.071,18.902 60.071,22.987 ; v3(61.722,47.879) 64.135,47.879 64.262,47.752 ; 64.262,47.879 70.999,47.879 73.533,45.345 J4.B1A12@73.533,44.831 ; R25.1 64.631,23.925 64.045,24.511 ; P1.1 72.729,20.892 74.449,20.892 75.027,21.47 75.082,24.511 ; 72.569,38.152 70.739,36.322 70.739,32.717 70.153,32.131 65.278,32.131 64.627,32.782 64.135,32.782 59.588,32.782 ; pad.@76.835,28.448 75.151,28.288 75.117,26.411 75.082,24.511 ; 51.308,34.29 52.197,35.179 C11.1@52.197,36.712 ; C11.1@52.197,36.712 54.111,36.712 54.991,37.592 J1.4 57.594,37.592 59.588,35.598 59.588,32.782 ; 57.439,32.782 55.196,32.782 54.61,32.196 54.61,25.986 55.196,25.4 57.822,25.4 58.408,24.814 ư\ư\ư\\\.1 60.071,22.987 ; 57.439,32.782 59.588,32.782 ; 60.071,22.987 61.595,24.511 64.045,24.511 ; 64.045,24.511 75.082,24.511
  Bottom Layer w0.25: JP2.2 JP2.2@60.223,55.855
  Bottom Layer w0.6: v1(3.302,47.244) 2.286,46.228 2.286,38.354 3.048,37.592 v1(4.445,37.592) 8.331,33.706 8.331,26.122 7.493,25.283 v1(7.493,18.415) ; v3(9.779,18.415) 9.779,11.858 10.709,10.928 10.709,10.669 10.785,10.593 v3(10.837,10.541) ; v3@10.843,10.97 14.351,14.478 v3(24.511,14.478) 22.86,16.129 v1(22.86,19.685) ; v1(18.288,36.068) v1(22.606,36.068)
  Bottom Layer w1: v3@10.785,10.593 9.027,10.593 8.952,10.668 7.952,10.668 7.366,10.082 7.366,6.128 8.206,5.288 25.844,5.288 30.462,9.906 41.402,9.906 ; J5.3 38.683,53.367 38.683,52.331 39.579,51.435 47.413,51.435 48.02,52.042 48.02,53.329 J2.7 ; J5.3@38.608,53.467 J5.6 ; J6.1@41.402,17.392 41.402,9.906 ; v3(48.133,9.906) 41.402,9.906 ; JP2.2@60.223,55.855 60.198,55.829 60.198,49.403 v3(61.722,47.879)
  other v2: 32.217,36.916 33.317,36.916 34.417,36.916 35.517,36.916 33.317,38.016 34.417,38.016 35.517,38.016 36.617,38.016 32.217,39.116 33.317,39.116 34.417,39.116 35.517,39.116 36.617,39.116 32.217,40.216 33.317,40.216 34.417,40.216 35.517,40.216 36.617,40.216 33.317,41.316 34.417,41.316 35.517,41.316
GPS_VBAT: BT1.POS C22.2 C23.2 R11.1 U4.6 | length 33.6
  Top Layer w0.25: BT1.POS 4.584,19.92 4.73,20.066 5.88,20.066 6.388,20.574 v1(8.509,20.574) ; R11.1 8.78,22.11 9.968,23.298 9.968,23.76 11.1,24.892 18.364,24.892 19.075,24.181 19.075,22.517 18.668,22.11 C22.2
  Top Layer w0.4: U4.6 15.963,20.726 16.256,21.019 C23.2 C22.2
  Bottom Layer w0.25: v1(8.509,20.574) 12.827,24.892 v1(14.478,24.892)
I2C3_SCL: J2.1 J2.5 U1.29 | length 35.4
  Top Layer w0.25: U1.29 42.684,38.366 v1(43.688,39.37) ; J2.5 53.2,53.404 53.2,55.944 J2.1
  Bottom Layer w0.25: v1(43.688,39.37) 43.768,39.37 44.276,39.878 44.821,39.878 46.125,41.182 49.623,41.182 51.562,39.243 53.387,39.243 54.61,40.466 54.61,46.385 53.144,47.851 J2.5@53.144,53.391
I2C3_SDA: J2.2 J2.6 U1.45 | length 30
  Top Layer w0.25: v1(32.258,45.212) 33.167,44.303 U1.45 ; J2.6 50.8,53.543 50.8,55.829 J2.2
  Bottom Layer w0.25: v1(32.258,45.212) 32.258,46.863 35.56,50.165 50.038,50.165 50.648,50.775 J2.6
IMU_REGOUT: C12.2 U3.10 | length 3.8
  Top Layer w0.2: U3.10 6.785,45.732 C12.2
IMU_SCL: R8.1 U1.21 U3.23 | length 40
  Top Layer w0.2: U3.23 7.585,37.337 7.747,37.175 R8.1
  Top Layer w0.25: R8.1 7.847,35.941 8.622,35.166 10.178,35.166 10.318,35.306 v1(11.684,35.306) ; U1.21 35.667,32.913 v1(36.576,32.004)
  Bottom Layer w0.25: v1(11.684,35.306) 11.684,35.226 12.192,34.718 12.192,31.953 13.085,31.06 35.632,31.06 v1(36.576,32.004)
IMU_SDA: R9.1 U1.46 U3.24 | length 38.3
  Top Layer w0.2: U3.24 7.991,37.954 7.992,37.872 8.05,37.814 9.649,36.241 R9.1
  Top Layer w0.25: R9.1@9.552,35.941 14.205,35.941 14.351,36.087 v1(14.351,37.592) ; v1(29.464,44.45) 32.118,44.45 32.667,43.901 U1.46
  Bottom Layer w0.25: v1(14.351,37.592) 14.351,45.028 14.751,45.429 29.318,45.429 29.464,45.282 v1(29.464,44.45)
IMU_VIN: C4.2 C5.2 C6.2 C7.2 C8.2 C9.2 C11.2 C18.2 C19.2 C20.2 C21.2 C24.2 C25.2 D1.A J1.1 J2.4 J2.8 J6.2 JP2.1 JP3.1 R1.2 R8.2 R9.2 R10.2 R12.1 R17.2 U1.1 U1.9 U1.24 U1.36 U1.48 U2.3 U2.7 U2.8 U3.1 U3.8 U3.13 U3.22 U4.8 U5.1 U5.10 | length 331.8
  Top Layer w0.2: 7.185,37.011 U3.22 ; U3.8 7.585,42.764 7.685,42.864
  Top Layer w0.25: R10.2 v3(27.559,17.145) ; R12.1 R12.1@26.168,12.567 ; v3@27.553,12.567 v3(27.559,12.573) ; 27.559,37.338 28.037,37.816 30.642,37.816 30.692,37.866 U1.9 ; U1.1 31.017,42.358 31.163,42.504 U1.48@31.667,42.504 ; C5.2@40.005,45.72 v3(40.005,47.244)
  Top Layer w0.4: C18.2 6.794,35.381 6.794,36.62 7.185,37.011 ; 7.685,42.864 8.128,43.307 v3(10.033,43.307) ; C8.2 27.063,42.727 27.432,42.358 31.017,42.358 ; C9.2@27.063,47.142 C9.2 ; 37.338,35.716 40.64,35.716 42.66,33.696 ; U1.36@37.846,41.91 37.846,44.069 39.3,45.523 39.808,45.523 40.005,45.72 40.998,45.72 42.014,46.736 C4.2 ; C25.2 C25.2@42.335,20.758 ; R17.2@47.376,27.717 R17.2
  Top Layer w0.46: 8.636,39.251 8.636,38.75 8.905,38.481 9.692,38.481 9.961,38.75 v3@9.961,43.235
  Top Layer w0.5: C8.2 C9.2@27.063,47.142 ; 44.323,22.687 44.323,24.664 R17.2@47.376,27.717 ; U2.7 47.625,42.774 49.149,44.298 v3(49.149,44.323)
  Top Layer w0.6: C19.2@3.837,34.417 C18.2@5.73,34.417 ; C19.2 3.837,34.517 3.202,34.517 2.54,35.179 2.54,43.21 2.891,43.561 v3(4.064,43.561) 4.192,43.433 4.391,43.433 5.334,42.49 5.334,41.586 ; D1.A@5.08,25.542 5.08,33.667 5.642,34.229 5.642,34.329 C18.2@5.73,34.417 ; C18.2 5.742,34.429 C18.2@5.73,34.417 ; v3(15.621,34.417) C18.2@5.73,34.417 ; R1.2 v3(22.987,34.417) 24.638,34.417 27.559,37.338 ; v3(21.59,27.305) 22.987,28.702 v3@22.987,34.222 ; R12.1@26.168,12.567 v3@27.553,12.567 ; v3(49.149,44.323) 52.197,44.323 ; J1.1@56.959,45.212 J1.1
  Top Layer w0.7: v3(9.525,7.747) 9.525,11.684 11.049,13.208 11.049,21.336 11.761,22.048 12.396,22.048 C20.2 ; C20.2@12.346,22.098 13.763,22.098 ; U4.8 13.763,22.098 ; C21.2 13.763,22.098 ; U2.8 U2.7
  Top Layer w1: JP3.1 v3(24.003,47.117) 24.055,47.169 25.339,47.169 25.923,47.752 C9.2@26.788,47.752 ; J6.2@38.862,17.092 38.862,20.802 39.139,20.802 39.139,22.101 39.74,22.702 40.106,22.702 40.589,23.185 40.589,25.026 41.427,25.864 41.427,26.949 42.66,28.182 C7.2 C6.2 42.66,33.696 46.393,33.696 49.066,36.369 49.066,36.899 49.066,38.271 49.76,38.965 52.197,38.965 ; C11.2 52.197,38.965 ; J1.1@56.959,45.212 52.783,45.212 52.197,44.626 52.197,44.323 52.197,38.965
  Bottom Layer w0.25: 24.949,19.628 27.432,17.145 v3(27.559,17.145)
  Bottom Layer w0.6: v3(4.064,43.561) 6.857,43.561 7.111,43.307 v3(10.033,43.307) ; v3(9.525,7.747) 9.652,7.874 24.892,7.874 27.559,10.541 v3(27.559,12.573) v3@27.559,17.018 ; v3(21.59,27.305) 21.59,22.987 24.949,19.628 v3@27.559,17.018 ; v3(27.559,17.145) v3@27.559,17.018 ; v3(40.005,47.244) 40.005,43.608 41.843,41.77 43.802,41.77 46.355,44.323 v3(49.149,44.323)
  Bottom Layer w1: v3(22.987,34.417) v3(15.621,34.417) 15.548,34.417 15.413,34.552 15.318,34.552 13.335,36.535 13.335,45.72 15.367,47.752 19.331,47.752 19.966,47.117 v3(24.003,47.117) ; JP3.1 26.924,55.88 28.843,57.799 45.593,57.799 ; J2.8 J2.4@45.568,56.007 ; J2.4 45.593,57.799 ; J1.1 57.333,45.212 57.658,45.537 JP2.1 57.333,56.205 57.333,57.213 56.747,57.799 45.593,57.799
IO_A1: R22.1 R25.2 U1.11 | length 49.3
  Top Layer w0.25: v1(28.214,30.46) 28.214,35.453 29.627,36.866 U1.11 ; v1(61.595,21.209) 61.611,21.193 63.119,21.193 ; R22.1@63.119,20.193 R22.1 ; R25.2@63.119,22.238 63.131,22.25 R25.2
  Top Layer w0.4: R22.1@63.119,20.193 63.119,21.193 R25.2@63.119,22.238
  Bottom Layer w0.25: v1(28.214,30.46) 28.785,29.889 29.464,29.21 53.594,29.21 v1(61.595,21.209)
IO_A9: R23.1 R26.2 U1.30 | length 42.2
  Top Layer w0.25: U1.30 41.914,38.866 v1(42.926,39.878) ; v1(67.806,42.05) R26.2 67.806,43.078 67.818,43.078 R23.1
  Bottom Layer w0.25: v1(42.926,39.878) 42.926,39.797 42.545,39.416 42.545,36.703 45.593,33.655 59.411,33.655 v1(67.806,42.05)
IO_A10: J1.5 U1.31 | length 22.7
  Top Layer w0.25: U1.31 41.334,39.366 42.507,40.538 44.314,40.538 44.975,39.878 v1(46.736,39.878)
  Bottom Layer w0.25: v1(46.736,39.878) 47.371,40.513 49.251,40.513 54.712,35.052 J1.5
IO_B0: JP1.3 U1.18 | length 36.8
  Top Layer w0.25: U1.18 34.167,15.236 43.053,6.35 44.45,6.35 45.11,5.69 45.11,4.42 JP1.3
IO_B1: JP1.2 U1.19 | length 38.4
  Top Layer w0.25: U1.19 34.667,16.133 43.561,7.239 46.203,7.239 47.752,5.69 JP1.2
IO_B2: JP1.1 U1.20 | length 39.8
  Top Layer w0.25: U1.20 35.167,17.033 44.199,8.001 46.077,8.001 48.172,5.906 49.974,5.906 50.19,5.69 50.19,4.42 JP1.1
MCU_NRST: C3.2 JP3.2 R1.1 SW1.1 U1.7 | length 61.9
  Top Layer w0.25: C3.2 17.78,37.846 v1@17.78,37.686 ; v1(17.78,37.766) 18.271,37.275 ; 18.231,37.235 18.542,36.924 21.074,36.924 ; R1.1 19.201,35.051 21.074,36.924 ; U1.7 26.503,38.866 24.56,36.924 21.074,36.924
  Top Layer w0.3: R1.1 19.201,32.855 20.814,31.242 SW1.1
  Bottom Layer w0.25: v1(17.78,37.766) 17.78,43.558 17.926,43.704 29.969,43.704 30.115,43.851 30.115,50.637 29.969,50.784 21.609,50.784 21.463,50.93 JP3.2
MCU_OSC_IN: C1.1 U1.5 X1.1 | length 13.5
  Top Layer w0.25: C1.1 20.435,42.557 X1.1 23.647,42.037 25.818,39.866 U1.5
MCU_OSC_OUT: R2.1 U1.6 | length 11
  Top Layer w0.3: R2.1 24.45,38.1 25.716,39.366 U1.6
NetC10_2: C10.2 U1.22 | length 6.7
  Top Layer w0.25: U1.22 36.167,35.041 36.167,33.427 38.989,30.605 C10.2
NetC13_1: C13.1 C14.1 L1.1 R6.2 | length 5.8
  Top Layer w0.4: C14.1 C13.1 19.731,5.588 19.934,5.791 20.701,5.791 20.904,5.588 R6.2 22.2,5.588 22.227,5.561 L1.1
NetC15_1: C15.1 C17.1 R7.2 | length 14.7
  Top Layer w0.3: C17.1 R7.2 13.589,4.748 13.765,4.572 23.889,4.572 24.917,5.6 C15.1
NetC15_2: C15.2 J3.1 L1.2 | length 6.7
  Top Layer w0.4: L1.2 24.028,7.139 24.067,7.1 C15.2 26.238,7.1 26.758,7.62 J3.1
NetC28_2: R16.1 U5.6 U5.7 U5.8 ư\ư\ư\\\.2 | length 12.4
  Top Layer w0.5: 47.307,23.431 U5.7 56.564,23.431 56.908,23.087 56.908,21.828 57.888,20.848 R16.1
NetD1_C: D1.C R11.2 | length 3.7
  Top Layer w0.4: D1.C 5.08,22.182 5.811,22.913 5.811,23.109 6.312,23.61 R11.2
NetD2_A: D2.A R10.1 | length 4
  Top Layer w0.25: R10.1 24.523,17.729 25.258,17.729 26.477,18.948 D2.A
NetD2_K: D2.K Q1.3 | length 4.4
  Top Layer w0.25: D2.K 24.577,20.523 25.248,20.523 26.518,21.793 26.518,22.926 Q1.3
NetD4_A: D4.A R17.1 | length 2.7
  Top Layer w0.4: R17.1 49.276,29.362 49.337,29.423 D4.A
NetD5_A: D5.A R24.1 | length 3.4
  Top Layer w0.25: R24.1 57.216,28.6 R24.1@57.591,28.975
  Top Layer w0.5: R24.1@57.591,28.975 58.877,30.261 58.927,30.261 59.177,30.511 D5.A
NetJ4_A5: J4.A5 R20.2 | length 10.7
  Top Layer w0.25: R20.2 68.093,34.311 68.093,34.819 69.723,36.449 69.723,40.006 69.869,40.152 J4.A5
NetJ4_A6: J4.A6 J4.B6 R19.2 | length 11.6
  Top Layer w0.25: R19.2 67.806,37.731 68.072,37.465 68.619,37.465 68.765,37.611 68.765,40.32 69.597,41.152 72.898,41.152 ; J4.A6 72.898,41.152 ; J4.B6 72.898,42.152 72.669,41.923 72.669,41.381 72.898,41.152
NetJ4_A7: J4.A7 J4.B7 R18.2 | length 12
  Top Layer w0.25: R18.2 68.081,36.343 68.61,36.343 69.215,36.948 69.215,40.134 69.733,40.652 J4.B7 74.231,40.652 74.447,40.869 74.447,41.427 74.223,41.652 J4.A7
NetJ4_B5: J4.B5 R21.2 | length 6.9
  Top Layer w0.25: R21.2 67.806,40.74 70.218,43.152 J4.B5
NetL2_1: L2.1 U5.2 | length 7.4
  Top Layer w0.25: L2.1 L2.1@44.323,15.803 ; 46.228,18.923 46.617,19.312 U5.2
  Top Layer w0.45: L2.1@44.323,15.803 44.323,15.964 44.362,16.003 44.362,16.731 44.768,17.137 45.657,17.137 46.101,17.581 46.101,18.796
NetL2_2: L2.2 U5.4 | length 7.8
  Top Layer w0.25: U5.4 47.617,18.931 48.006,18.542 ; 50.345,16.838 50.345,14.806 L2.2
  Top Layer w0.45: 48.006,18.542 48.641,18.542 50.345,16.838
NetP1_2: P1.2 SW2.2 | length 23.5
  Top Layer w0.25: v3(68.834,22.733) v3@68.961,22.86 ; P1.2@71.942,22.86 P1.2
  Top Layer w1: v3@68.961,22.86 P1.2@71.942,22.86
  Bottom Layer w1: v3(68.834,22.733) 68.834,19.939 70.231,18.542 77.024,18.542 78.805,16.761 78.805,13.047 77.315,11.557 SW2.2
NetQ1_1: Q1.1 R13.1 | length 4.7
  Top Layer w0.25: R13.1 21.793,23.61 22.059,23.876 Q1.1
NetQ2_1: Q2.1 R14.1 R15.2 | length 7.8
  Top Layer w0.5: R14.1 65.381,15.343 64.627,14.589 64.627,12.827 65.508,11.946 R15.2
NetR3_2: R3.2 U1.44 | length 6.1
  Top Layer w0.25: R3.2 31.571,45.72 31.663,45.812 32.674,45.812 33.667,44.819 U1.44
NetR4_1: R4.1 U3.9 | length 4
  Top Layer w0.2: U3.9 7.185,43.634 R4.1@8.893,45.342
NetR5_1: R5.1 U3.11 | length 4.3
  Top Layer w0.2: R5.1 4.953,45.085 6.385,43.653 U3.11
NetR12_2: R12.2 U4.18 | length 5.2
  Top Layer w0.4: U4.18 22.698,9.968 23.791,11.061 R12.2
RF_IN: C16.1 R7.1 U4.11 | length 5.5
  Top Layer w0.3: R7.1 13.589,8.433 13.763,8.607 U4.11
  Top Layer w0.4: C16.1 12.089,5.6 R7.1
RX1: J5.5 U1.43 | length 15.2
  Top Layer w0.25: U1.43 34.167,48.518 37.211,51.562 37.211,54.864 J5.5
RX2: J5.2 U1.13 U4.2 | length 62.4
  Top Layer w0.25: U4.2 20.32,19.625 20.32,18.307 20.466,18.161 22.606,18.161 23.114,17.653 23.114,16.383 23.597,15.9 28.479,15.9 28.626,16.047 28.626,21.994 28.067,22.553 28.067,27.813 31.242,30.988 31.242,32.581 31.667,33.006 U1.13 ; v1(29.21,43.104) 29.159,43.053 28.067,43.053 27.838,43.282 27.838,48.074 30.248,50.484 33.415,50.484 36.068,53.137 J5.2
  Bottom Layer w0.25: v1(29.21,43.104) 29.21,38.207 28.956,37.953 28.956,33.187 29.631,32.512 v1(31.242,32.512)
SPI3_CS: JP2.3 U1.38 | length 37.2
  Top Layer w0.25: U1.38 36.667,45.264 40.552,49.149 v1(62.738,49.149)
  Bottom Layer w0.25: v1(62.738,49.149) JP2.3
SPI3_MISO: JP2.5 U1.40 | length 45.5
  Top Layer w0.25: U1.40 35.667,42.841 35.717,42.891 35.717,46.259 39.941,50.483 62.421,50.483 64.008,52.07 64.008,57.404 64.262,57.658 67.437,57.658 67.818,57.277 JP2.5
  Bottom Layer w0.25: JP2.5@67.818,55.626 JP2.5
SPI3_MOSI: JP2.6 U1.41 | length 48
  Top Layer w0.25: U1.41 35.167,47.193 41.284,53.31 41.357,53.383 41.387,55.462 41.418,56.236 41.486,56.304 43.601,58.42 69.164,58.42 70.358,57.226 JP2.6
SPI3_SCK: JP2.4 U1.39 | length 40.1
  Top Layer w0.25: U1.39 36.167,46.073 40.052,49.958 65.132,49.958 65.278,50.104 JP2.4
SWCLK: J1.3 U1.37 | length 29.2
  Top Layer w0.25: U1.37 37.167,44.66 v1(37.973,45.466) ; v1(53.721,41.275) 53.778,41.218 53.778,40.63 54.276,40.132 J1.3
  Bottom Layer w0.25: v1(37.973,45.466) 37.973,42.044 39.151,40.866 44.699,40.866 46.505,42.672 49.183,42.672 49.437,42.926 52.578,42.926 53.121,42.383 53.121,41.875 v1(53.721,41.275)
SWDIO: J1.2 U1.34 | length 23.2
  Top Layer w0.25: U1.34 40.485,40.866 v1(42.164,42.545) ; v1(53.721,42.672) J1.2
  Bottom Layer w0.25: v1(42.164,42.545) 43.307,42.545 46.609,45.847 51.141,45.847 52.674,44.314 52.674,43.719 v1(53.721,42.672)
TFT_CS: JP1.7 U1.14 | length 32.6
  Top Layer w0.25: U1.14 32.167,9.87 35.052,6.985 JP1.7
TFT_MISO: JP1.5 U1.16 | length 35.1
  Top Layer w0.25: U1.16 33.167,13.188 40.132,6.223 JP1.5 40.345,4.993 40.356,5.03 40.356,5.068 JP1.5@40.356,5.092
TFT_MOSI: JP1.4 U1.17 | length 35.1
  Top Layer w0.25: U1.17 33.667,14.212 42.404,5.475 42.404,4.586 JP1.4
TFT_SCK: JP1.6 U1.15 | length 33.4
  Top Layer w0.25: U1.15 32.667,31.683 32.673,31.677 32.673,11.65 37.592,6.731 JP1.6
TX1: J5.4 U1.42 | length 25.5
  Top Layer w0.25: J5.4 33.528,57.226 33.731,57.429 40.367,57.429 40.513,57.283 40.513,53.467 34.667,47.621 U1.42
TX2: J5.1 U1.12 U4.3 | length 45.1
  Top Layer w0.25: U4.3 19.263,20.168 20.48,21.385 21.512,21.385 v1(23.114,22.987) 25.115,22.987 26.495,24.368 26.495,27.894 30.353,31.751 v1(30.353,33.274) 31.017,33.938 U1.12
  Bottom Layer w0.25: v1(30.353,33.274) 30.353,33.316 30.099,33.57 30.099,42.73 31.645,44.275 31.645,51.584 J5.1
USB_D_N: R18.1 U1.32 | length 38.3
  Top Layer w0.26: 54.362,46.708 57.077,46.708 57.081,46.713 59.332,46.713 62.611,43.434 62.611,39.813 65.381,37.043 66.154,37.043 66.306,36.89 R18.1
  Top Layer w0.27: U1.32@37.827,39.876 38.152,39.876 38.155,39.879 41.197,39.879 48.016,46.698 54.352,46.698 54.362,46.708
USB_D_P: R19.1 U1.33 | length 38
  Top Layer w0.26: 54.163,47.171 54.168,47.171 54.17,47.173 54.666,47.173 54.668,47.171 56.885,47.171 56.89,47.176 59.524,47.176 63.074,43.626 63.074,40.005 65.573,37.506 66.154,37.506 66.306,37.659 R19.1
  Top Layer w0.27: U1.33@38.152,40.356 38.155,40.353 41.001,40.353 47.82,47.171 54.163,47.171
V_BAT: pad.@76.708,32.004 Q2.2 R22.2 SW2.3 | length 52
  Top Layer w1: R22.2 64.643,19.558 70.32,13.881 ; Q2.2 65.815,13.589 SW2.3
  Bottom Layer w1: pad.@76.708,32.004 75.057,32.512 67.056,24.511 67.056,16.891 69.723,14.224 75.868,14.224 76.503,13.589 SW2.3
V_BUS: D3.A J4.A4B9 J4.B4A9 R14.2 R23.2 R24.2 | length 59.8
  Top Layer w0.5: R23.2 66.318,46.316 66.611,46.609 69.018,46.609 70.542,45.085 71.589,45.085 72.822,43.852 72.918,43.852 72.968,43.802 J4.B4A9 74.562,43.802 ; J4.A4B9 75.705,39.002
  Top Layer w0.75: 74.562,43.802 75.705,42.659
  Top Layer w1: R24.2 59.116,27.971 59.544,27.971 59.702,27.813 63.985,27.813 64.493,28.321 72.652,28.321 73.238,28.907 73.238,33.868 73.952,34.582 76.249,34.582 76.835,35.168 76.835,36.703 75.705,37.833 75.705,39.002 75.705,42.659
  Bottom Layer w1: v3(61.214,16.256) 64.566,19.608 v3(64.566,28.321)
V_PWR: C26.2 C27.1 D3.K Q2.3 R16.2 U5.5 | length 2.6
  Top Layer w0.25: C27.1@56.388,11.151 C27.1@56.388,12.331
  Top Layer w0.4: C27.1@56.388,12.331 C27.1 C27.1@56.388,13.716
VDD_RF: R6.1 U4.14 | length 6
  Top Layer w0.25: U4.14 17.063,8.972 17.374,8.661 19.253,8.661 20.827,7.088 R6.1
XTAL_IN: C2.1 R2.2 X1.3 | length 4.4
  Top Layer w0.4: C2.1 17.501,40.271 17.635,40.137 X1.3 18.655,39.32 19.062,38.913 R2.2
pads on no net: J4.A8 J4.B8 J4.SH P1.P1 P1.P2 SW2.1 SW2.4 SW2.5 U3.2 U3.3 U3.4 U3.5 U3.6 U3.7 U3.12 U3.14 U3.15 U3.16 U3.17 U3.19 U3.21 U4.5 U4.7 U4.9 U4.13 U4.15 U4.16 U4.17 U4.19 U4.20 U4.21 U4.22 U4.23 U4.24 U4.25 U4.26 U4.27 U4.28

## Polygon pours and split planes (outlines as drawn)
GND on Top Layer "GND_L01_P010" (solid, pour order 10): 0.254,60.198 80.137,60.198 80.137,0.254 0.254,0.254
IMU_VIN on Top Layer "IMU_VIN_L01_P001" (solid, pour order 1): 46.307,19.685 46.307,20.955 44.704,20.955 44.704,23.241 46.307,23.241 46.307,23.876 45.852,23.876 43.815,23.876 43.434,23.495 43.434,21.59 37.846,21.59 37.846,19.685
V_BUS on Top Layer "V_BUS_L01_P008" (solid, pour order 8): 60.325,17.011 60.325,12.319 61.722,12.319 61.976,12.573 61.976,14.097 63.5,15.621 64.389,15.621 64.389,17.011
V_PWR on Top Layer "V_PWR_L01_P007" (solid, pour order 7): 47.927,20.988 56.007,20.927 56.007,14.351 59.182,11.176 61.468,11.176 62.738,12.446 62.738,13.462 64.135,13.462 64.135,11.822 61.965,9.652 57.404,9.652 53.34,13.716 53.34,18.923 49.011,18.923 47.927,20.007
GND on Bottom Layer "GND_L02_P009" (solid, pour order 9): 80.137,60.198 0.254,60.198 0.254,0.254 80.137,0.254

## Silkscreen, mask and mechanical layers (free items; w line width, h text height)
Top Overlay:
  text "GND" at 61.014,49.56 h1.2 r90
  text "CS3" at 63.681,49.56 h1.2 r90
  text "SCK3" at 65.967,49.503 h1.2 r90
  text "BTN3" at 11.865,49.349 h1.2 r90
  text "BTN2" at 14.659,49.222 h1.2 r90
  text "BTN1" at 17.072,49.222 h1.2 r90
  text "3.3V" at 24.819,49.213 h1.2 r90
  text "RST" at 22.533,49.179 h1.2 r90
  text "BTN0" at 19.612,49.095 h1.2 r90
  text "3.3V" at 58.601,48.687 h1.2 r90
  text "MOSI3" at 68.806,48.525 h1.2 r90
  text "GND" at 48.822,48.417 h1.2 r90
  text "MISO3" at 71.346,48.398 h1.2 r90
  text "3.3V" at 46.282,47.417 h1.2 r90
  text "GND" at 39.196,47.354 h1.2 r90
  text "SDA3" at 51.489,47.09 h1.2 r90
  text "SCL3" at 54.156,47.09 h1.2 r90
  text "RX2_RX1" at 36.59,44.523 h1 r90
  text "3.3V" at 59.355,44.523 h1.2
  text "TX2_TX1" at 34.05,44.396 h1 r90
  text "DIO" at 59.412,42.11 h1.2
  text "CLK" at 59.466,39.57 h1.2
  text "GND" at 59.466,36.776 h1.2
  text "A10" at 59.412,34.363 h1.2
  text "BAT+" at 68.89,31.188 h1.52
  text "BAT-" at 68.89,27.632 h1.52
  text "STM32 NAVIGATION MODULE" at 0.581,26.616 h1.5
  text "+" at 66.094,22.171 h1.52
  text "-" at 66.094,19.377 h1.52
  text "GND" at 41.964,12.476 h1.2 r90
  text "3.3V" at 39.424,11.476 h1.2 r90
  text "B2" at 50.8,7.366 h1.2 r90
  text "B0" at 45.847,7.239 h1.2 r90
  text "B1" at 48.387,7.239 h1.2 r90
  text "SCK" at 38.481,6.604 h1.52 r90
  text "CS" at 35.687,6.477 h1.52 r90
  text "MISO" at 40.64,6.477 h1.2 r90
  text "MOSI" at 43.18,6.477 h1.2 r90
  text "OFF<->ON" at 73.206,4.757 h1.52 r90
  text "TFT_LCD" at 38.227,0.979 h1.3
Bottom Overlay:
  drawing of 14 lines, arcs and shapes, not listed
  text "COMPUTER ENGINEERING PROJECT" at 43.815,28.194 h1.52
  text "SEMESTER 251" at 43.815,26.035 h1.52
  text "NGUYEN DUY BACH_2210185" at 43.688,20.955 h1.52
  text "NGUYEN PHUC AN_2210002" at 43.688,18.288 h1.52
Mechanical 1:
  the board outline again, w0.5

## Text inside footprints (layer, text, board x,y; h text height)
D2: Mechanical 13 "+" at 27.294,20.939 h1
D4: Mechanical 13 "+" at 50.154,31.734 h1
D5: Mechanical 13 "+" at 59.994,31.861 h1
J4: Mechanical 13 "PCB EDGE" at 80.083,40.386 h0.25 r90